# Altium PCB pcbsaytasodevi.PcbDoc
Units mm, origin at the board's own origin, x right, y up, seen from the top; angles counter-clockwise.
Board outline 100 x 50 mm, 2 copper layers (Top Layer, Bottom Layer); 33 components, 34 nets, 86 pads, 8 vias.
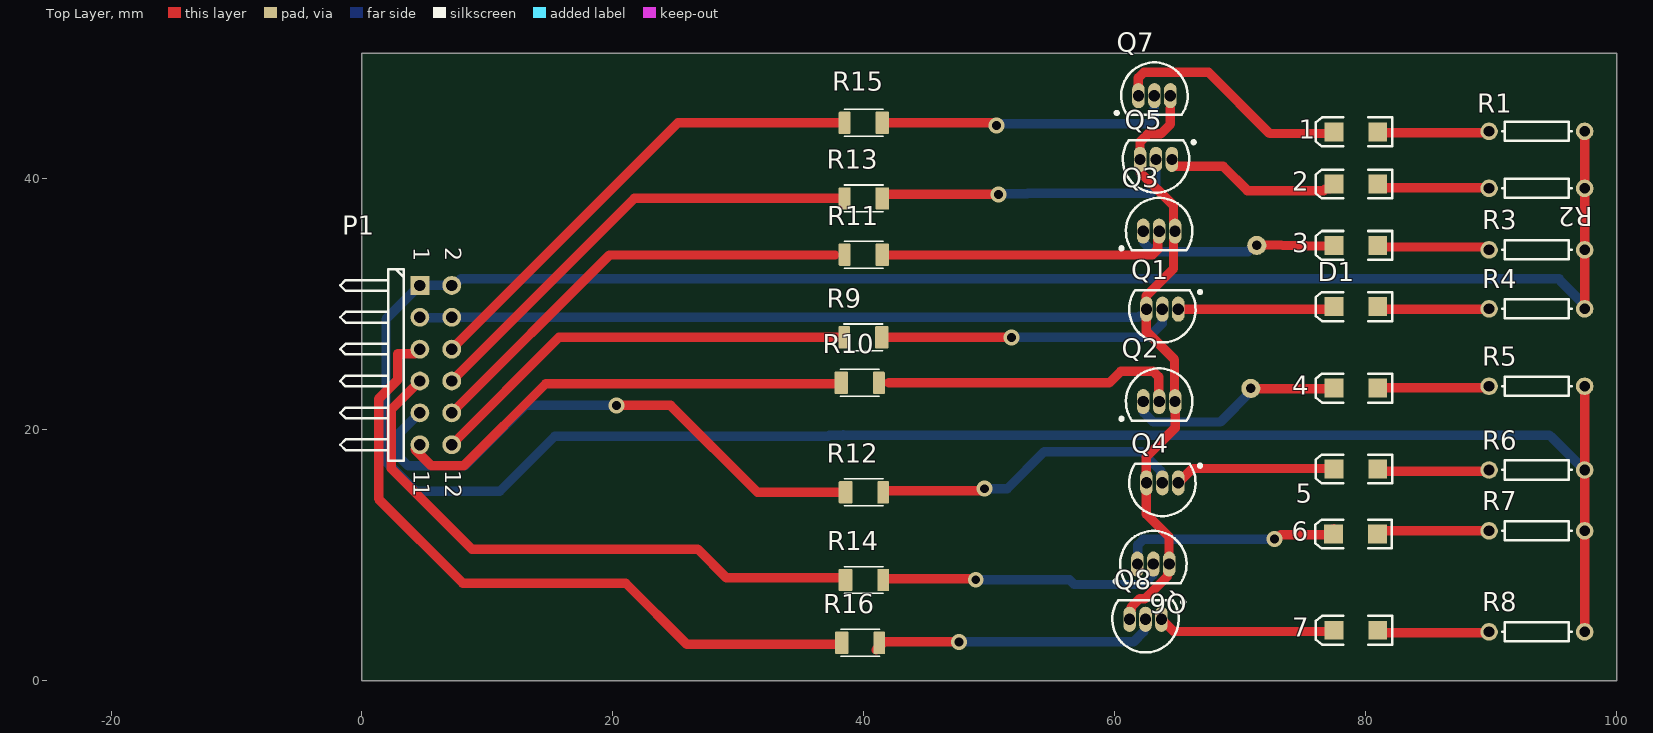
[diagram p0: Top Layer view]
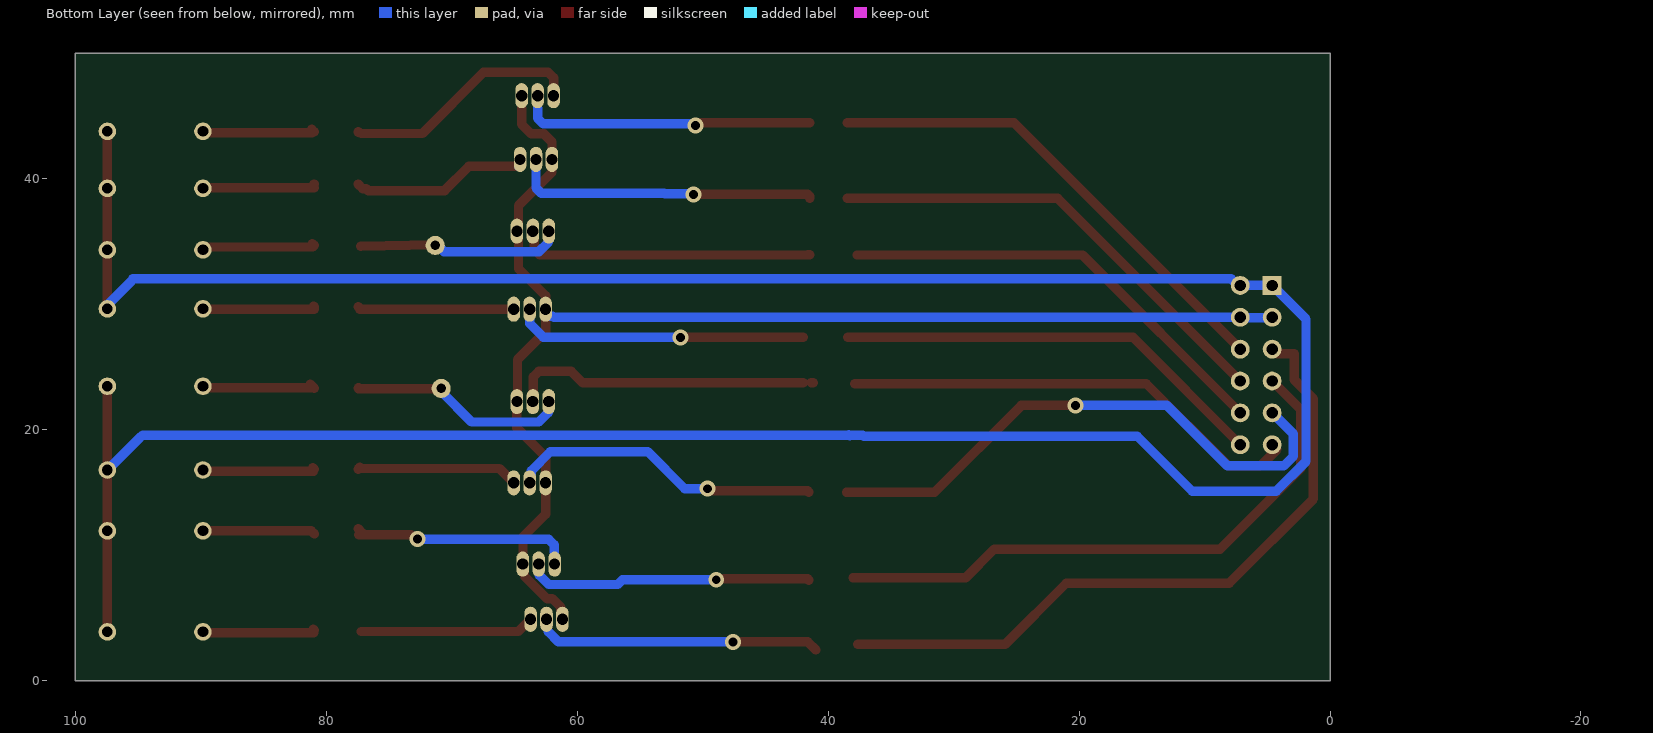
[diagram p1: Bottom Layer view, seen from below]

## Layer stack, top to bottom
Top Solder: solder mask 0.0102, Solder Resist, Dk 3.5
Top Layer: signal copper 0.0356
Dielectric 1: dielectric 0.32, FR-4, Dk 4.8
Bottom Layer: signal copper 0.0356
Bottom Solder: solder mask 0.0102, Solder Resist, Dk 3.5

## Board outline
0,0 100,0 100,50 0,50

## Design rules (kind name [scope] priority, off if disabled: settings)
Clearance [All] p1: gap=0.254 ignorepadtopadclearanceinfootprint=FALSE except(0: Arc-Hole Track-Hole SMDPad-Hole THPad-Hole Via-Hole Fill-Hole Poly-Hole Region-Hole Text-Hole)
PolygonConnect [All] p1: connectstyle=Relief reliefconductorwidth=0.254 reliefentries=4 polygonreliefangle="90 Angle" airgapwidth=0.254
RoutingVias [All] p1: holewidth=0.711 width=1.27 viastyle="Through Hole" minholewidth=0.711 minwidth=1.27 maxholewidth=0.711 maxwidth=1.27
SolderMaskExpansion [All] p1: expansion=0.102 istentingtop=FALSE
Width [All] p1: maxlimit=1 minlimit=0.75 preferedwidth=0.75 minimp=50.000000 maximp=50.000000 favimp=50.000000
30 further rules are at their usual default settings.

## Components (designator, comment, footprint, x,y, rotation, side; value= is the part's Value field where it differs from the comment)
1 "LED7" 3.2X1.6X1.1 79.225,43.75 r180 top
2 "LED6" 3.2X1.6X1.1 79.225,39.6 r180 top
3 "LED5" 3.2X1.6X1.1 79.225,34.7 r180 top
4 "LED0" 3.2X1.6X1.1 79.225,23.325 r180 top
5 "LED1" 3.2X1.6X1.1 79.225,16.875 r180 top
6 "LED2" 3.2X1.6X1.1 79.2,11.7 r180 top
7 "LED3" 3.2X1.6X1.1 79.225,4.025 r180 top
D1 "LED2" 3.2X1.6X1.1 79.225,29.825 r180 top
P1 "Header 6X2H" HDR2X6H 4.616,31.512 r270 top
Q1 "NPN" TO-226-AA 63.798,29.618 r90 top
Q2 "NPN" TO-226-AA 63.544,22.252 r270 top
Q3 "NPN" TO-226-AA 63.544,35.841 r270 top
Q4 "NPN" TO-226-AA 63.798,15.775 r90 top
Q5 "NPN" TO-226-AA 63.29,41.556 r90 top
Q6 "NPN" TO-226-AA 63.08,9.3 r270 top
Q7 "NPN" TO-226-AA 63.163,46.636 r270 top
Q8 "NPN" TO-226-AA 62.455,4.9 r90 top
R1 "Res1" AXIAL-0.3 93.65,43.8 r0 top value=390
R2 "Res1" AXIAL-0.3 93.65,39.25 r0 top value=390
R3 "Res1" AXIAL-0.3 93.65,34.35 r0 top value=390
R4 "Res1" AXIAL-0.3 93.65,29.65 r0 top value=390
R5 "Res1" AXIAL-0.3 93.65,23.475 r0 top value=390
R6 "Res1" AXIAL-0.3 93.65,16.8 r0 top value=390
R7 "Res1" AXIAL-0.3 93.65,11.95 r0 top value=390
R8 "Res1" AXIAL-0.3 93.65,3.9 r0 top value=390
R9 "4-1879462-2" RESC3115X65N 39.975,27.375 r180 top
R10 "4-1879462-2" RESC3115X65N 39.665,23.75 r0 top
R11 "4-1879462-2" RESC3115X65N 40.01,33.961 r180 top
R12 "4-1879462-2" RESC3115X65N 40.01,15.025 r0 top
R13 "4-1879462-2" RESC3115X65N 40.01,38.45 r180 top
R14 "4-1879462-2" RESC3115X65N 40.01,8.025 r0 top
R15 "4-1879462-2" RESC3115X65N 40.01,44.475 r180 top
R16 "4-1879462-2" RESC3115X65N 39.7,3.025 r0 top

## Footprints (in the part's own frame and the unit in brackets; to place one, negate y for a bottom-side part, rotate by r counter-clockwise, add the part's x,y. Pads: shape width x height; smd on the part's side, far side on the other; paste and mask are expansions set on the pad)
3.2X1.6X1.1 [mm] "SMT LED; 2 Flat Leads"
  rect 1.5x1.5 smd: 1(-1.75,0) 2(1.75,0)
  silkscreen extent -2.9,-1.15 3.2,1.15
AXIAL-0.3 [mm] "Axial Device, Thru-Hole; 2 Leads; 0.3 in Pin Spacing"
  round 1.4 hole 0.85: 1(-3.81,0) 2(3.81,0)
  silkscreen extent -2.77,-0.76 2.77,0.76
HDR2X6H [mm] "Connector; Header; 6x2 Position; Right Angle"
  rect 1.5x1.5 hole 0.9: 1(0,0)
  round 1.5 hole 0.9: 2(0,2.54) 3(2.54,0) 4(2.54,2.54) 5(5.08,0) 6(5.08,2.54) 7(7.62,0) 8(7.62,2.54) 9(10.16,0) 10(10.16,2.54) 11(12.7,0) 12(12.7,2.54)
  silkscreen extent -1.27,-6.35 13.97,-1.27
RESC3115X65N [mm]
  rrect14% 1.09x1.77 smd: 1(-1.465,0)
  rrect14% 0.94x1.77 smd: 2(1.54,0)
  silkscreen extent -1.55,-1.06 1.55,1.06
TO-226-AA [mm] "TO, Flat Index; 3 In-Line, Axial Leads; Body Dia. 4.8mm; Leads 0.55 x 0.51 mm (max)"
  oval 2x1 hole 0.9: 1(0,-1.27) 2(0,0) 3(0,1.27)
  silkscreen extent -2.65,-3.13 1.52,2.65, body extent -2.65,-2.66 1.52,2.66, height 5.33

## Part data
1 2 3 4 5 7: library part LED2, "Typical RED, GREEN, YELLOW, AMBER GaAs LED", LatestRevisionDate=17-Jul-2002, LatestRevisionNote="Re-released for DXP Platform.", PackageDescription="SM LED; 2 Flat Leads", PackageReference=3.2X1.6X1.1, PackageVersion=Feb-2002, Published=8-Jun-2000, Publisher="Altium Limited"
6 D1: "Typical RED, GREEN, YELLOW, AMBER GaAs LED", LatestRevisionDate=17-Jul-2002, LatestRevisionNote="Re-released for DXP Platform.", PackageDescription="SM LED; 2 Flat Leads", PackageReference=3.2X1.6X1.1, PackageVersion=Feb-2002, Published=8-Jun-2000, Publisher="Altium Limited"
P1: "Header, 6-Pin, Dual row, Right Angle", LatestRevisionDate=17-Jul-2002, LatestRevisionNote="Re-released for DXP Platform.", Publisher="Altium Limited"
Q1 Q2 Q3 Q4 Q5 Q6 Q7 Q8: "NPN Bipolar Transistor", Code_JEDEC=TO-226-AA, LatestRevisionDate=17-Jul-2002, LatestRevisionNote="Re-released for DXP Platform.", PackageDescription="TO, Flat Index; 3 In-Line, Axial Leads; Body Dia. 4.8mm; Leads 0.55 x 0.51 mm (max)", PackageReference=TO-226-AA, Published=8-Jun-2000, Publisher="Altium Limited"
R1 R2 R3 R4 R5 R6 R7 R8: "Resistor", LatestRevisionDate=17-Jul-2002, LatestRevisionNote="Re-released for DXP Platform.", PackageDescription="Axial Device, Thru-Hole; 2 Leads; 0.3 in Pin Spacing", PackageReference=AXIAL-0.3, Published=8-Jun-2000, Publisher="Altium Limited"
R9 R10 R11 R12 R13 R14 R15 R16: "RL73H 2B R82 1% 1K RL", Package=None, Availability=Unavailable, MP=4-1879462-2, Price=None

## Free pads (board coordinates)
  round 1.524 hole 0.762: 5(71.325,34.7) 6(70.85,23.3)

## Via types
v1: diameter 1.27, hole 0.711, Top Layer to Bottom Layer, 8 vias

## Nets (pads, with @x,y where several pads share a name; then routed paths per layer and width w, separated by ;. In a path a pad name is that pad's centre, name@x,y a point inside that pad or via, vN(x,y) a via of type N, cw(c..) or ccw(c..) an arc to the next point about the centre after c; other vN are vias at no path point)
GND: P1.3 P1.4 Q1.3 Q2.3 Q3.3 Q4.3 Q5.3 Q6.3 Q7.3 Q8.3 | length 107.2
  Top Layer w0.75: Q8.3 61.185,5.468 61.326,5.609 61.326,5.868 61.987,6.529 62.406,6.529 64.209,8.332 64.209,8.484 64.225,8.5 64.225,8.607 64.35,8.732 Q6.3 ; Q6.3@64.325,9.575 64.325,11.475 62.528,13.272 Q4.3 62.528,17.858 64.814,20.144 Q2.3 64.766,22.3 64.766,25.602 62.528,27.84 Q1.3 62.528,30.685 64.687,32.844 64.687,35.841 64.687,37.873 62.02,40.54 Q5.3 62.02,42.953 62.655,43.588 63.671,43.588 64.433,44.35 64.433,45.62
  Bottom Layer w0.75: P1.3 4.638,28.95 P1.4@7.123,28.95 ; P1.4 7.159,28.975 61.885,28.975 61.98,29.07 62.413,29.07 62.528,29.186 Q1.3 ; Q2.3 64.814,22.645 Q2.3@64.929,22.76
Net1_1: 1.1 R1.1 | length 9
  Top Layer w0.75: 1.1 1.1@81.176,43.951 ; 1.1@81.126,43.676 89.716,43.676 R1.1
Net1_2: 1.2 Q7.1 | length 19
  Top Layer w0.75: Q7.1 61.893,48.061 62.332,48.5 67.475,48.5 72.35,43.625 1.2@77.225,43.625 ; 1.2@77.45,43.725 1.2
Net2_1: 2.1 R2.1 | length 8.9
  Top Layer w0.75: 2.1@80.963,39.288 89.803,39.288 R2.1 ; 2.1 2.1@81.013,39.563
Net2_2: 2.2 Q5.1 | length 15
  Top Layer w0.75: Q5.1 64.56,41.124 64.675,41.008 68.642,41.008 70.575,39.075 76.661,39.075 76.811,39.225 77.1,39.225 2.2
  Bottom Layer w0.75: Q5.1 64.56,41.124 Q5.1@64.675,41.008
Net3_1: 3.1 R3.1 | length 9.1
  Top Layer w0.75: 3.1 3.1@81.125,34.85 ; 3.1@81.075,34.575 89.439,34.575 89.664,34.35 R3.1
Net3_2: 3.2 pad.5 Q3.1 | length 16.7
  Top Layer w0.75: Q3.1@62.159,36.095 Q3.1@62.159,36.389 ; pad.5 71.383,34.756 3.2@77.27,34.642
  Bottom Layer w0.75: Q3.1 62.322,35.793 62.322,34.942 63.051,34.212 70.628,34.212 71.116,34.7 pad.5
Net4_1: 4.1 R5.1 | length 9.1
  Top Layer w0.75: 4.1 4.1@81.276,23.626 ; 4.1@81.226,23.351 89.716,23.351 R5.1
Net4_2: 4.2 pad.6 Q2.1 | length 17.4
  Top Layer w0.75: pad.6 70.888,23.263 4.2@77.438,23.263 ; 4.2@77.438,23.363 4.2
  Bottom Layer w0.75: Q2.1 62.322,22.204 62.322,21.378 63.076,20.623 68.423,20.623 pad.6@70.85,23.05
Net5_1: 5.1 R6.1 | length 9
  Top Layer w0.75: 5.1 5.1@81.075,16.975 ; 5.1@81.025,16.7 89.74,16.7 R6.1
Net5_2: 5.2 Q4.1 | length 13
  Top Layer w0.75: Q4.1 66.211,16.918 5.2@77.375,16.918 ; 5.2@77.332,17.018 5.2
Net6_1: 6.1 R7.1 | length 9
  Top Layer w0.75: 6.1 81.2,11.95 R7.1
Net6_2: 6.2 Q6.1 | length 17
  Top Layer w0.75: v1(72.75,11.3) 72.891,11.3 73.241,11.65 6.2@77.425,11.65 ; 6.2@77.1,11.75 6.2@77.475,12.125
  Bottom Layer w0.75: Q6.1@61.85,10.229 61.85,10.836 62.289,11.275 72.725,11.275 v1(72.75,11.3)
Net7_1: 7.1 R8.1 | length 9
  Top Layer w0.75: 7.1 7.1@81.05,4.1 ; 7.1@81,3.825 89.765,3.825 R8.1
Net7_2: 7.2 Q8.1 | length 13.9
  Top Layer w0.75: Q8.1 64.7,3.925 7.2@77.225,3.925
NetD1_1: D1.1 R4.1 | length 9
  Top Layer w0.75: D1.1@80.975,29.6 89.79,29.6 R4.1 ; D1.1 D1.1@81.025,29.875
NetD1_2: D1.2 Q1.1 | length 12.4
  Top Layer w0.75: Q1.1 D1.2@77.325,29.618 ; D1.2@77.368,29.718 D1.2
NetP1_5: P1.5 R16.1 | length 54.7
  Top Layer w0.75: P1.5@4.235,26.062 2.838,26.062 2.838,23.979 1.326,22.467 1.326,14.493 8.045,7.774 21.026,7.774 25.875,2.925 37.661,2.925
NetP1_6: P1.6 R15.2 | length 38.8
  Top Layer w0.75: P1.6 7.156,26.443 25.188,44.475 R15.2
NetP1_7: P1.7 R14.1 | length 46.7
  Top Layer w0.75: P1.7@4.235,23.522 2.33,21.617 2.33,16.918 8.772,10.476 26.774,10.476 29.05,8.2 R14.1@38.025,8.2
NetP1_8: P1.8 R13.2 | length 37.4
  Top Layer w0.75: P1.8 7.156,23.903 21.703,38.45 R13.2
NetP1_9: P1.9 R12.1 | length 44.4
  Top Layer w0.75: v1(20.275,21.95) 24.603,21.95 31.528,15.025 R12.1
  Bottom Layer w0.75: P1.9@4.235,20.982 2.921,19.668 2.921,17.898 3.691,17.128 8.178,17.128 13,21.95 v1(20.275,21.95)
NetP1_10: P1.10 R11.2 | length 35.8
  Top Layer w0.75: P1.10@7.151,21.358 19.729,33.936 37.702,33.936
NetP1_11: P1.11 R10.1 | length 36.9
  Top Layer w0.75: P1.11@4.235,18.442 5.549,17.128 8.096,17.128 14.643,23.675 R10.1@37.875,23.675
NetP1_12: P1.12 R9.2 | length 34.8
  Top Layer w0.75: P1.12@7.151,18.818 15.708,27.375 R9.2
NetQ1_2: Q1.2 R9.1 | length 23.4
  Top Layer w0.75: 42,27.375 v1(51.775,27.375)
  Bottom Layer w0.75: v1(51.775,27.375) 62.698,27.375 63.798,28.475 Q1.2
NetQ2_2: Q2.2 R10.2 | length 24.2
  Top Layer w0.75: R10.2 41.33,23.75 R10.2@41.355,23.775 ; 42.003,23.75 59.581,23.75 60.496,24.665 63.057,24.665 63.496,24.226 63.496,22.3 Q2.2
NetQ3_2: Q3.2 R11.1 | length 23.9
  Top Layer w0.75: R11.1 41.62,33.961 41.645,33.936 62.978,33.936 63.417,34.375 63.417,35.146 63.496,35.226 63.496,36.027 Q3.2@63.429,36.095
NetQ4_2: Q4.2 R12.2 | length 25.1
  Top Layer w0.75: R12.2 41.55,15.045 41.645,15.14 49.44,15.14 v1(49.608,15.308)
  Bottom Layer w0.75: v1(49.608,15.308) 51.433,15.308 54.375,18.25 62.15,18.25 63.657,16.743 63.657,16.484 63.798,16.343 Q4.2
NetQ5_2: Q5.2 R13.1 | length 24.5
  Top Layer w0.75: R13.1 41.475,38.61 41.645,38.78 50.72,38.78 v1(50.75,38.75)
  Bottom Layer w0.75: v1(50.75,38.75) 50.825,38.825 53.041,38.825 53.066,38.85 62.851,38.85 63.29,39.289 Q5.2
NetQ6_2: Q6.2 R14.2 | length 23.2
  Top Layer w0.75: R14.2 41.55,8.03 41.645,8.125 48.85,8.125 v1(48.925,8.05)
  Bottom Layer w0.75: v1(48.925,8.05) 56.4,8.05 56.779,7.671 62.278,7.671 63.032,8.426 63.032,8.84 63.075,8.882 62.95,9.007 Q6.2@62.95,9.575
NetQ7_2: Q7.2 R15.1 | length 22.8
  Top Layer w0.75: R15.1 50.375,44.475 v1(50.575,44.275)
  Bottom Layer w0.75: v1(50.575,44.275) 50.675,44.375 51.042,44.375 51.068,44.4 62.724,44.4 63.163,44.839 63.163,45.62
NetQ8_2: Q8.2 R16.2 | length 21.9
  Top Layer w0.75: R16.2@40.978,2.453 41.625,3.1 v1(47.6,3.1)
  Bottom Layer w0.75: v1(47.6,3.1) 61.5,3.1 62.3,3.9
VCC: P1.1 P1.2 R1.2 R2.2 R3.2 R4.2 R5.2 R6.2 R7.2 R8.2 | length 241.4
  Top Layer w0.75: R8.2 R7.2 R6.2 R5.2 ; R4.2 R3.2 R2.2 R1.2
  Bottom Layer w0.75: P1.1@4.235,31.142 1.917,28.824 1.917,17.482 4.299,15.1 10.975,15.1 15.361,19.486 37.178,19.486 ; P1.1 4.629,31.525 7.143,31.525 P1.2 7.359,31.512 7.878,32.031 95.425,32.031 ; 37.267,19.575 38.337,19.575 ; 38.273,19.511 38.337,19.575 ; 38.362,19.6 38.337,19.575 ; 94.625,19.575 38.337,19.575 ; 94.86,19.4 R6.2 ; 95.544,31.856 R4.2@97.525,29.875

## Other copper
Top Layer:
  region: -22.837,4.876
  region: -22.837,4.876
  region: -22.837,4.876
  region: -22.837,4.876
  region: -22.837,4.876
  region: -22.837,4.876
  region: -22.837,4.876
  region: -22.837,4.876
  region: -22.837,4.876
  region: -22.837,4.876
  region: -22.837,4.876
  region: -22.837,4.876
  region: -22.837,4.876
  region: -22.837,4.876
  region: -22.837,4.876
  region: -22.837,4.876
  region: -22.837,4.876
  region: -22.837,4.876
  region: -22.837,4.876
  region: -22.837,4.876
  region: -22.837,4.876
  region: -22.837,4.876
  region: -22.837,4.876
  region: -22.837,4.876
  region: -22.837,4.876
  region: -22.837,4.876
  region: -22.837,4.876
  region: -22.837,4.876
  region: -22.837,4.876
  region: -22.837,4.876
  region: -22.837,4.876
  region: -22.837,4.876
  region: -22.837,4.876
  region: -22.837,4.876
  region: -22.837,4.876
  region: -22.837,4.876
  region: -22.837,4.876
  region: -22.837,4.876
  region: -22.837,4.876
  region: -22.837,4.876
  region: -22.837,4.876
  region: -22.837,4.876
  region: -22.837,4.876
  region: -22.837,4.876
  region: -22.837,4.876
  region: -22.837,4.876
  region: -22.837,4.876
  region: -22.837,4.876
  region: -22.837,4.876
  region: -22.837,4.876
  region: -22.837,4.876
  region: -22.837,4.876
  region: -22.837,4.876
  region: -22.837,4.876

## Text inside footprints (layer, text, board x,y; h text height)
P1: Top Overlay "12" at 6.648,16.78 h1.27 r270; Top Overlay "1" at 4.108,15.764 h1.27 r270; Top Overlay "1" at 4.108,16.78 h1.27 r270; Top Overlay "1" at 4.108,34.56 h1.27 r270; Top Overlay "2" at 6.648,34.56 h1.27 r270